# EAGLE board Button_Pad (EAGLE 5.11)
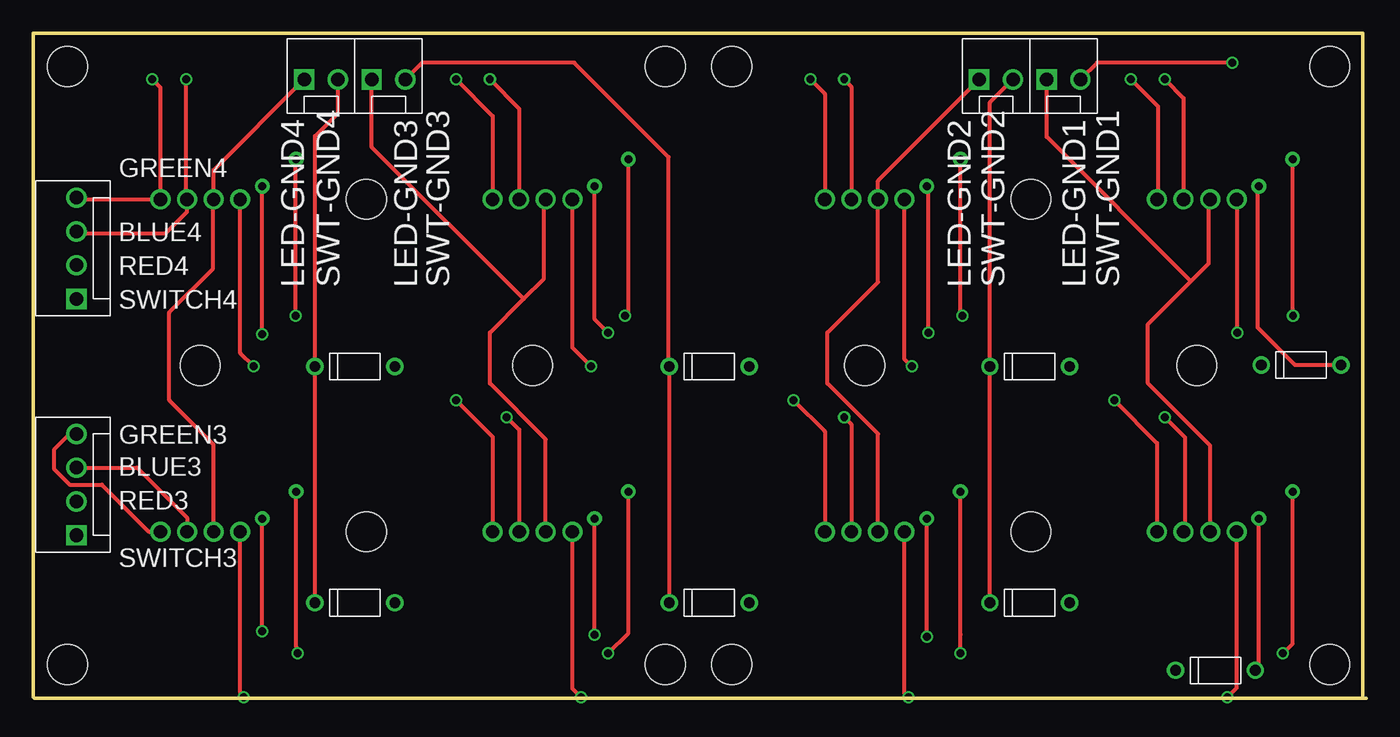
[diagram p0: board, top side]
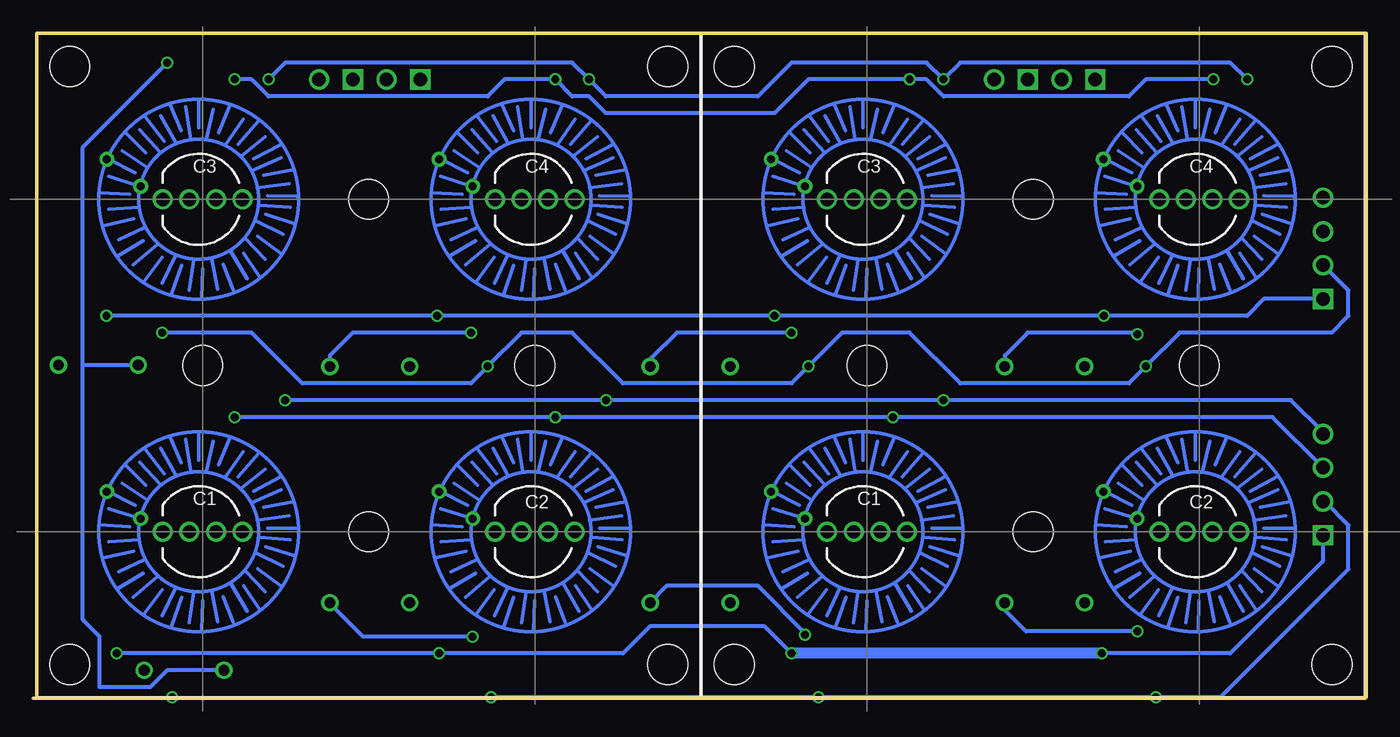
[diagram p1: board, bottom side, seen from below]

Size 100.33 x 50.04 mm. Coordinates in mm from the lower left corner, seen from the top.
Outline: 100.08,0.08 100.08,50.04 0.08,50.04
Outline: 0,0.08 0,50.04
Outline: 100.33,0 0.08,0
Copper layers (1*16): Top 0.035mm / dielectric 1.5mm / Bottom 0.035mm
Design rules "Fusion_eagle_rule_v1.1": minimum track width 6mil, minimum drill 12mil, track to track 6mil, track to pad 6mil, pad to pad 6mil, via to via 6mil, smd to smd 0mil, copper to edge 10mil, drill to drill 10mil, minimum pad ring 10mil, minimum via ring 6mil, stop-mask expansion 2mil, vias tented up to drill 100mil, thermal gap 10mil
Net classes: 0 Default: width 0.254 mm; 1 Power: width 0.305 mm; 2 LEDPower: width 0.305 mm; 3 ButtonSignal: width 0.254 mm

## Footprints (pad centres in the part's own frame; a part is rotated, then mirrored left to right if it is on the bottom)
DOIDE-1N4148 = drill 0.8 round: P$1 3,0; P$2 -3,0
MOLEX-1X4 = drill 1.016 square: 1 0,0 | drill 1.016 round: 2 2.54,0; 3 5.08,0; 4 7.62,0
MOLEX-1X2 = drill 1.016 square: 1 0,0 | drill 1.016 round: 2 2.54,0
BUTTONPAD-2X2 = drill 1 round: BLU1 13.5,12.5; BLU2 38.5,12.5; BLU3 13.5,37.5; BLU4 38.5,37.5; GND1 11.5,12.5; GND2 36.5,12.5; GND3 11.5,37.5; GND4 36.5,37.5; GRN1 15.5,12.5; GRN2 40.5,12.5; GRN3 15.5,37.5; GRN4 40.5,37.5; RED1 9.5,12.5; RED2 34.5,12.5; RED3 9.5,37.5; RED4 34.5,37.5 | drill 0.6 round: SIG1 5.288,15.513; SIG2 7.828,13.481; SIG3 30.288,15.513; SIG4 32.828,13.481; SIG5 5.288,40.513; SIG6 7.828,38.481; SIG7 30.288,40.513; SIG8 32.828,38.481 | hole 3: 12.5,25; 25,37.5; 37.5,25; 25,12.5; 2.5,2.5; 2.5,47.5; 47.5,47.5; 47.5,2.5

## Placement (x,y rotation side)
D1  [DOIDE-1N4148]  50.88,24.97 0 top
D2  [DOIDE-1N4148]  50.88,7.19 0 top
D5  [DOIDE-1N4148]  24.21,24.97 0 top
D6  [DOIDE-1N4148]  24.21,7.19 0 top
D9  [DOIDE-1N4148]  95.43,25.09 0 top
D10  [DOIDE-1N4148]  88.98,2.11 0 top
D13  [DOIDE-1N4148]  75.01,24.97 0 top
D14  [DOIDE-1N4148]  75.01,7.19 0 top
JP1  [MOLEX-1X4]  3.25,30.05 90 top
JP2  [MOLEX-1X4]  3.25,12.27 90 top
JP5  [MOLEX-1X2]  25.48,46.56 0 top
JP6  [MOLEX-1X2]  20.4,46.56 0 top
JP7  [MOLEX-1X2]  76.28,46.56 0 top
JP8  [MOLEX-1X2]  71.2,46.56 0 top
P3  BUTTONPAD-4x4  [BUTTONPAD-2X2]  50.08,0.04 0 bottom
P4  BUTTONPAD-4x4  [BUTTONPAD-2X2]  100.08,0.04 0 bottom

## Library data of the parts
D1 D2 D5 D6 D9 D10 D13 D14 JP1 JP2 JP5-JP8 P3 P4 = SparkFun

## Nets
BLUE1 [LEDPower]: JP1.3 P3.BLU3 P3.BLU4 P4.BLU3 P4.BLU4
BLUE2 [LEDPower]: JP2.3 P3.BLU1 P3.BLU2 P4.BLU1 P4.BLU2
GREEN1 [LEDPower]: JP1.4 P3.GRN3 P3.GRN4 P4.GRN3 P4.GRN4
GREEN2 [LEDPower]: JP2.4 P3.GRN1 P3.GRN2 P4.GRN1 P4.GRN2
LED-GND1 [LEDPower]: JP5.1 P3.GND1 P3.GND3
LED-GND2 [LEDPower]: JP6.1 P3.GND2 P3.GND4
LED-GND3 [LEDPower]: JP7.1 P4.GND1 P4.GND3
LED-GND4 [LEDPower]: JP8.1 P4.GND2 P4.GND4
N$1: D1.P$1 P3.SIG6
N$2: D2.P$1 P3.SIG2
N$5: D5.P$1 P3.SIG8
N$6: D6.P$1 P3.SIG4
N$9: D9.P$1 P4.SIG6
N$10: D10.P$1 P4.SIG2
N$13: D13.P$1 P4.SIG8
N$14: D14.P$1 P4.SIG4
RED1 [LEDPower]: JP1.2 P3.RED3 P3.RED4 P4.RED3 P4.RED4
RED2 [LEDPower]: JP2.2 P3.RED1 P3.RED2 P4.RED2
S$24 [LEDPower]: P4.RED1
SWITCH1 [ButtonSignal]: JP1.1 P3.SIG5 P3.SIG7 P4.SIG5 P4.SIG7
SWITCH2 [ButtonSignal]: JP2.1 P3.SIG1 P3.SIG3 P4.SIG1 P4.SIG3
SWT-GND1 [ButtonSignal]: D1.P$2 D2.P$2 JP5.2
SWT-GND2 [ButtonSignal]: D5.P$2 D6.P$2 JP6.2
SWT-GND3 [ButtonSignal]: D9.P$2 D10.P$2 JP7.2
SWT-GND4 [ButtonSignal]: D13.P$2 D14.P$2 JP8.2

## Tracks (layer width: path | path; a pad name or v marks a point on that pad's centre or on a via)
BLUE1  (via drill 0.6)
  Top 0.305: JP1.3 3.38,35 9.98,35 11.58,36.6 P3.BLU4 11.58,37.6 11.51,37.67 v11.51,46.56 | P3.BLU3 36.58,44.35 v34.37,46.56 | P4.BLU4 61.58,46.02 v61.04,46.56 | P4.BLU3 86.58,45.15 v85.17,46.56
  Bottom 0.305: v85.17,46.56 83.9,46.56 82.63,45.29 66.12,45.29 64.85,46.56 v61.04,46.56 59.77,45.29 58.5,45.29 57.23,44.02 44.53,44.02 41.99,46.56 v34.37,46.56 33.1,46.56 31.83,45.29 17.86,45.29 16.59,46.56 v11.51,46.56
BLUE2  (via drill 0.6)
  Top 0.305: P3.BLU2 11.58,13.59 7.82,17.35 JP2.3 | P3.BLU1 36.58,20.22 v35.64,21.16 | P4.BLU2 61.58,20.62 v61.04,21.16 | P4.BLU1 86.69,12.65 86.69,19.63 v85.17,21.16
  Bottom 0.305: v85.17,21.16 v61.04,21.16 v35.64,21.16 7.06,21.16 JP2.3
GREEN1  (via drill 0.6)
  Top 0.305: JP1.4 3.38,37.54 P3.GRN4 9.58,45.95 v8.97,46.56 | P3.GRN3 34.58,43.81 v31.83,46.56 | P4.GRN4 59.58,45.48 v58.5,46.56 | P4.GRN3 84.66,37.54 84.66,44.53 v82.63,46.56
  Bottom 0.305: v8.97,46.56 10.24,47.83 30.56,47.83 v31.83,46.56 33.1,47.83 43.26,47.83 45.8,45.29 57.23,45.29 v58.5,46.56 59.77,47.83 81.36,47.83 v82.63,46.56
GREEN2  (via drill 0.6)
  Top 0.305: P3.GRN2 8.7,12.54 5.16,16.08 2.74,16.08 1.6,17.22 1.6,18.74 2.87,20.02 3,19.89 JP2.4 | P4.GRN1 84.58,19.21 v81.36,22.43 | P4.GRN2 59.58,20.08 v57.23,22.43 | P3.GRN1 34.58,19.68 v31.83,22.43
  Bottom 0.305: v81.36,22.43 v57.23,22.43 v31.83,22.43 5.66,22.43 3.25,20.02 JP2.4
LED-GND1
  Top 0.305: P3.GND3 38.58,37.43 38.43,37.29 38.43,31.57 36.91,30.05 | JP5.1 25.48,41.48 36.91,30.05 | 36.91,30.05 34.37,27.51 34.37,23.7 38.58,19.49 38.58,12.63 | 38.58,12.63 38.56,12.65 | P3.GND1 38.58,12.63
LED-GND2
  Top 0.305: JP6.1 13.58,39.74 P3.GND4 13.67,37.54 13.79,37.41 13.54,37.16 13.54,32.33 10.24,29.03 10.24,22.43 13.58,19.09 P3.GND2 13.55,12.54 13.54,12.52 13.58,12.48
LED-GND3
  Top 0.305: P4.GND3 88.47,37.54 88.47,32.72 87.13,31.38 | JP7.1 76.28,42.24 87.13,31.38 | 87.13,31.38 83.9,28.14 83.9,23.7 88.58,19.02 P4.GND1 88.47,12.65
LED-GND4
  Top 0.305: JP8.1 63.58,38.94 P4.GND4 63.58,31.32 59.77,27.51 59.77,23.7 63.58,19.89 P4.GND2 63.58,12.52 63.45,12.39
N$1  (via drill 0.6)
  Top 0.305: P3.SIG6 42.25,28.52 v43.26,27.51
  Bottom 0.305: D1.P$1 53.83,25.57 51.89,27.51 v43.26,27.51
N$2  (via drill 0.6)
  Top 0.305: P3.SIG2 42.24,13.54 v42.24,4.78
  Bottom 0.305: v42.24,4.78 42.24,4.9 45.8,8.46 52.65,8.46 53.92,7.19 D2.P$1
N$5  (via drill 0.6)
  Top 0.305: P3.SIG8 17.25,38.46 17.22,38.43 v17.22,27.38
  Bottom 0.305: D5.P$1 27.21,25.78 25.48,27.51 17.6,27.51 17.35,27.25 v17.22,27.38
N$6  (via drill 0.6)
  Top 0.305: P3.SIG4 17.24,13.52 17.22,13.54 v17.22,5.03
  Bottom 0.305: D6.P$1 27.21,6.63 25.6,5.03 v17.22,5.03
N$9
  Top 0.305: P4.SIG6 92.25,38.4 92.15,38.3 92.15,27.89 94.95,25.09 D9.P$1
N$10
  Top 0.305: D10.P$1 91.9,2.11 92.25,2.46 P4.SIG2
N$13  (via drill 0.6)
  Top 0.305: P4.SIG8 67.25,38.44 67.39,38.3 v67.39,27.51
  Bottom 0.305: D13.P$1 78.01,25.78 76.28,27.51 67.64,27.51 67.51,27.63 v67.39,27.51
N$14  (via drill 0.6)
  Top 0.305: P4.SIG4 67.25,4.66 v67.26,4.65
  Bottom 0.305: D14.P$1 78.05,7.19 75.51,4.65 v67.26,4.65
RED1  (via drill 0.6)
  Top 0.305: P3.RED4 15.58,25.98 v16.59,24.97 | P3.RED3 40.58,26.38 v41.99,24.97 | P4.RED4 65.58,25.51 v66.12,24.97 | P4.RED3 90.63,37.54 v90.63,27.51
  Bottom 0.305: JP1.2 1.35,30.68 1.35,28.78 2.62,27.51 14.05,27.51 v16.59,24.97 17.86,23.7 30.56,23.7 34.37,27.51 39.45,27.51 v41.99,24.97 43.26,23.7 55.96,23.7 59.77,27.51 63.58,27.51 v66.12,24.97 | v66.12,24.97 66.24,24.84 | v90.63,27.51 83.9,27.51 80.09,23.7 67.39,23.7 66.24,24.84 | v66.12,24.97 66.12,24.84 66.24,24.84
RED2  (via drill 0.6)
  Top 0.305: P4.RED2 65.58,0.36 v65.86,0.08 | P3.RED1 40.58,0.72 v41.22,0.08 | P3.RED2 15.58,0.45 15.82,0.2 v15.82,0.08
  Bottom 0.305: v65.86,0.08 v41.22,0.08 v15.82,0.08 11,0.08 1.35,9.73 1.35,13.03 3.12,14.81 JP2.2
S$24  (via drill 0.6)
  Top 0.305: P4.RED1 90.58,0.79 v89.87,0.08
SWITCH1  (via drill 0.6)
  Top 0.305: P3.SIG7 19.79,40.49 19.76,40.46 v19.76,28.78 | P3.SIG5 44.79,29.04 v44.53,28.78 | P4.SIG7 69.79,28.92 v69.93,28.78 | P4.SIG5 94.79,28.81 v94.82,28.78
  Bottom 0.305: JP1.1 7.7,30.05 8.97,28.78 v19.76,28.78 v44.53,28.78 v69.93,28.78 v94.82,28.78
SWITCH2  (via drill 0.6)
  Top 0.305: P3.SIG3 19.79,3.99 v19.89,3.38 | P3.SIG1 44.79,4.91 v43.26,3.38 | P4.SIG3 69.79,4.79 v69.8,3.38 | P4.SIG1 94.79,4.11 v94.06,3.38
  Bottom 0.305: JP2.1 3.25,10.36 10.24,3.38 v19.89,3.38 | v94.06,3.38 v69.8,3.38 55.96,3.38 53.92,5.41 45.29,5.41 v43.26,3.38
  Bottom 0.813: v19.89,3.38 v43.26,3.38
SWT-GND1
  Top 0.305: JP5.2 29.29,47.83 40.72,47.83 47.83,40.72 47.83,24.97 | 47.83,24.97 D1.P$2 | 47.83,24.97 47.88,24.92 D2.P$2 47.88,6.98
SWT-GND2
  Top 0.305: JP6.2 22.94,44.02 21.21,42.29 D5.P$2 21.21,7.24 21.16,7.19 | 21.16,7.19 21.21,7.14 | D6.P$2 21.16,7.19
SWT-GND3  (via drill 0.6)
  Top 0.305: JP7.2 80.09,47.83 v90.25,47.83
  Bottom 0.305: D9.P$2 96.59,25.09 96.6,25.09 | v90.25,47.83 96.6,41.48 96.6,25.09 | 96.6,25.09 96.6,5.92 95.33,4.65 95.33,0.84 91.52,0.84 90.25,2.11 D10.P$2
SWT-GND4
  Top 0.305: JP8.2 72.01,44.83 D13.P$2 72.01,7.24 71.96,7.19 D14.P$2

## Text on the board
tPlace: GREEN4 | BLUE4 | RED4 | LED-GND4 | SWT-GND4 | LED-GND3 | SWT-GND3 | LED-GND2 | SWT-GND2 | LED-GND1 | SWT-GND1 | SWITCH4 | GREEN3 | BLUE3 | RED3 | SWITCH3